# Altium PCB PCB2.PcbDoc
Units mm, origin at the board's own origin, x right, y up, seen from the top; angles counter-clockwise.
Board outline 69.51 x 75.85 mm, 2 copper layers (Top Layer, Bottom Layer); 17 components, 15 nets, 111 pads, 8 vias.
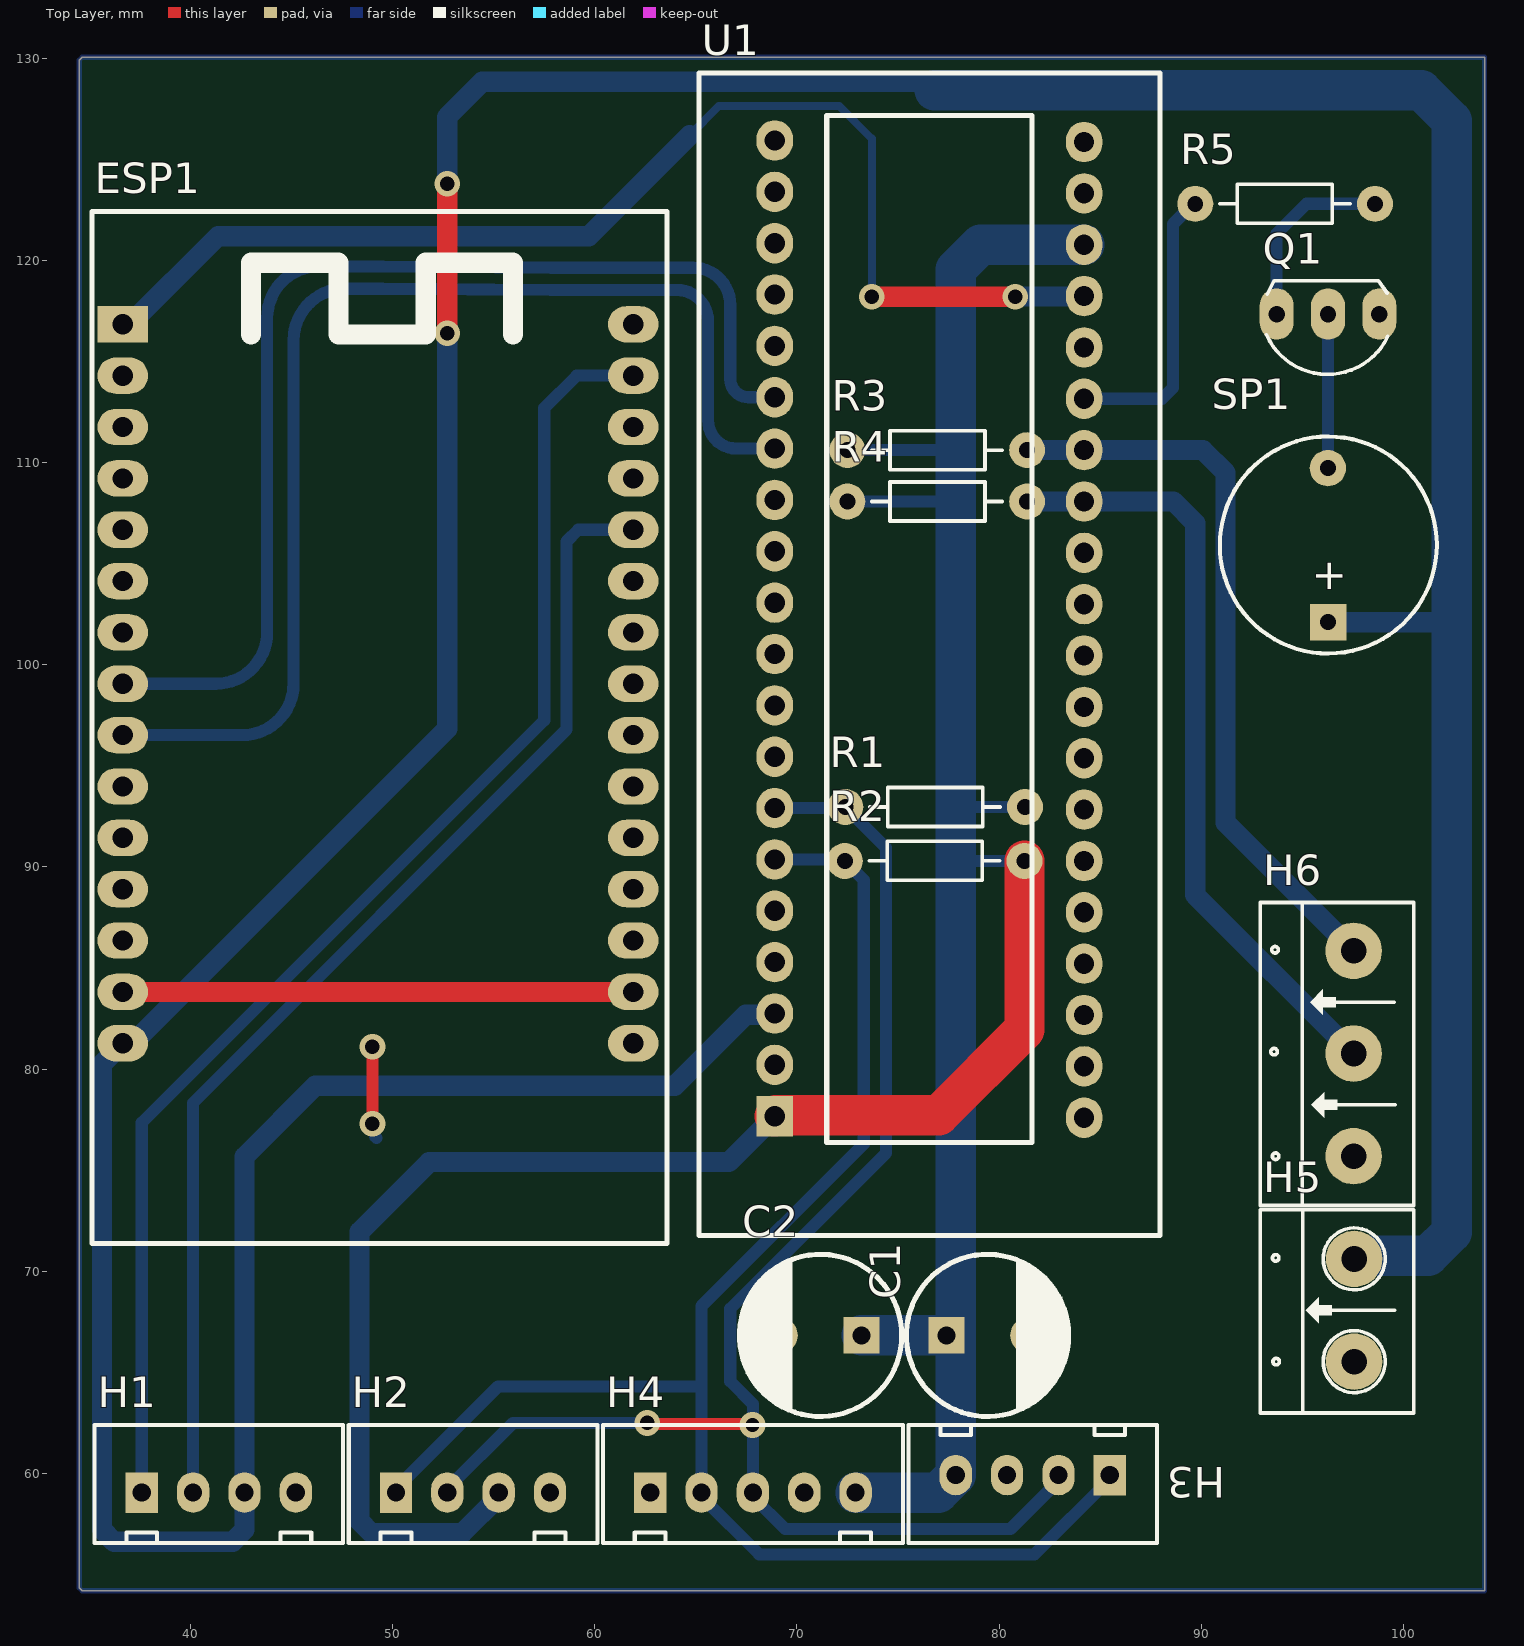
[diagram p0: Top Layer view]
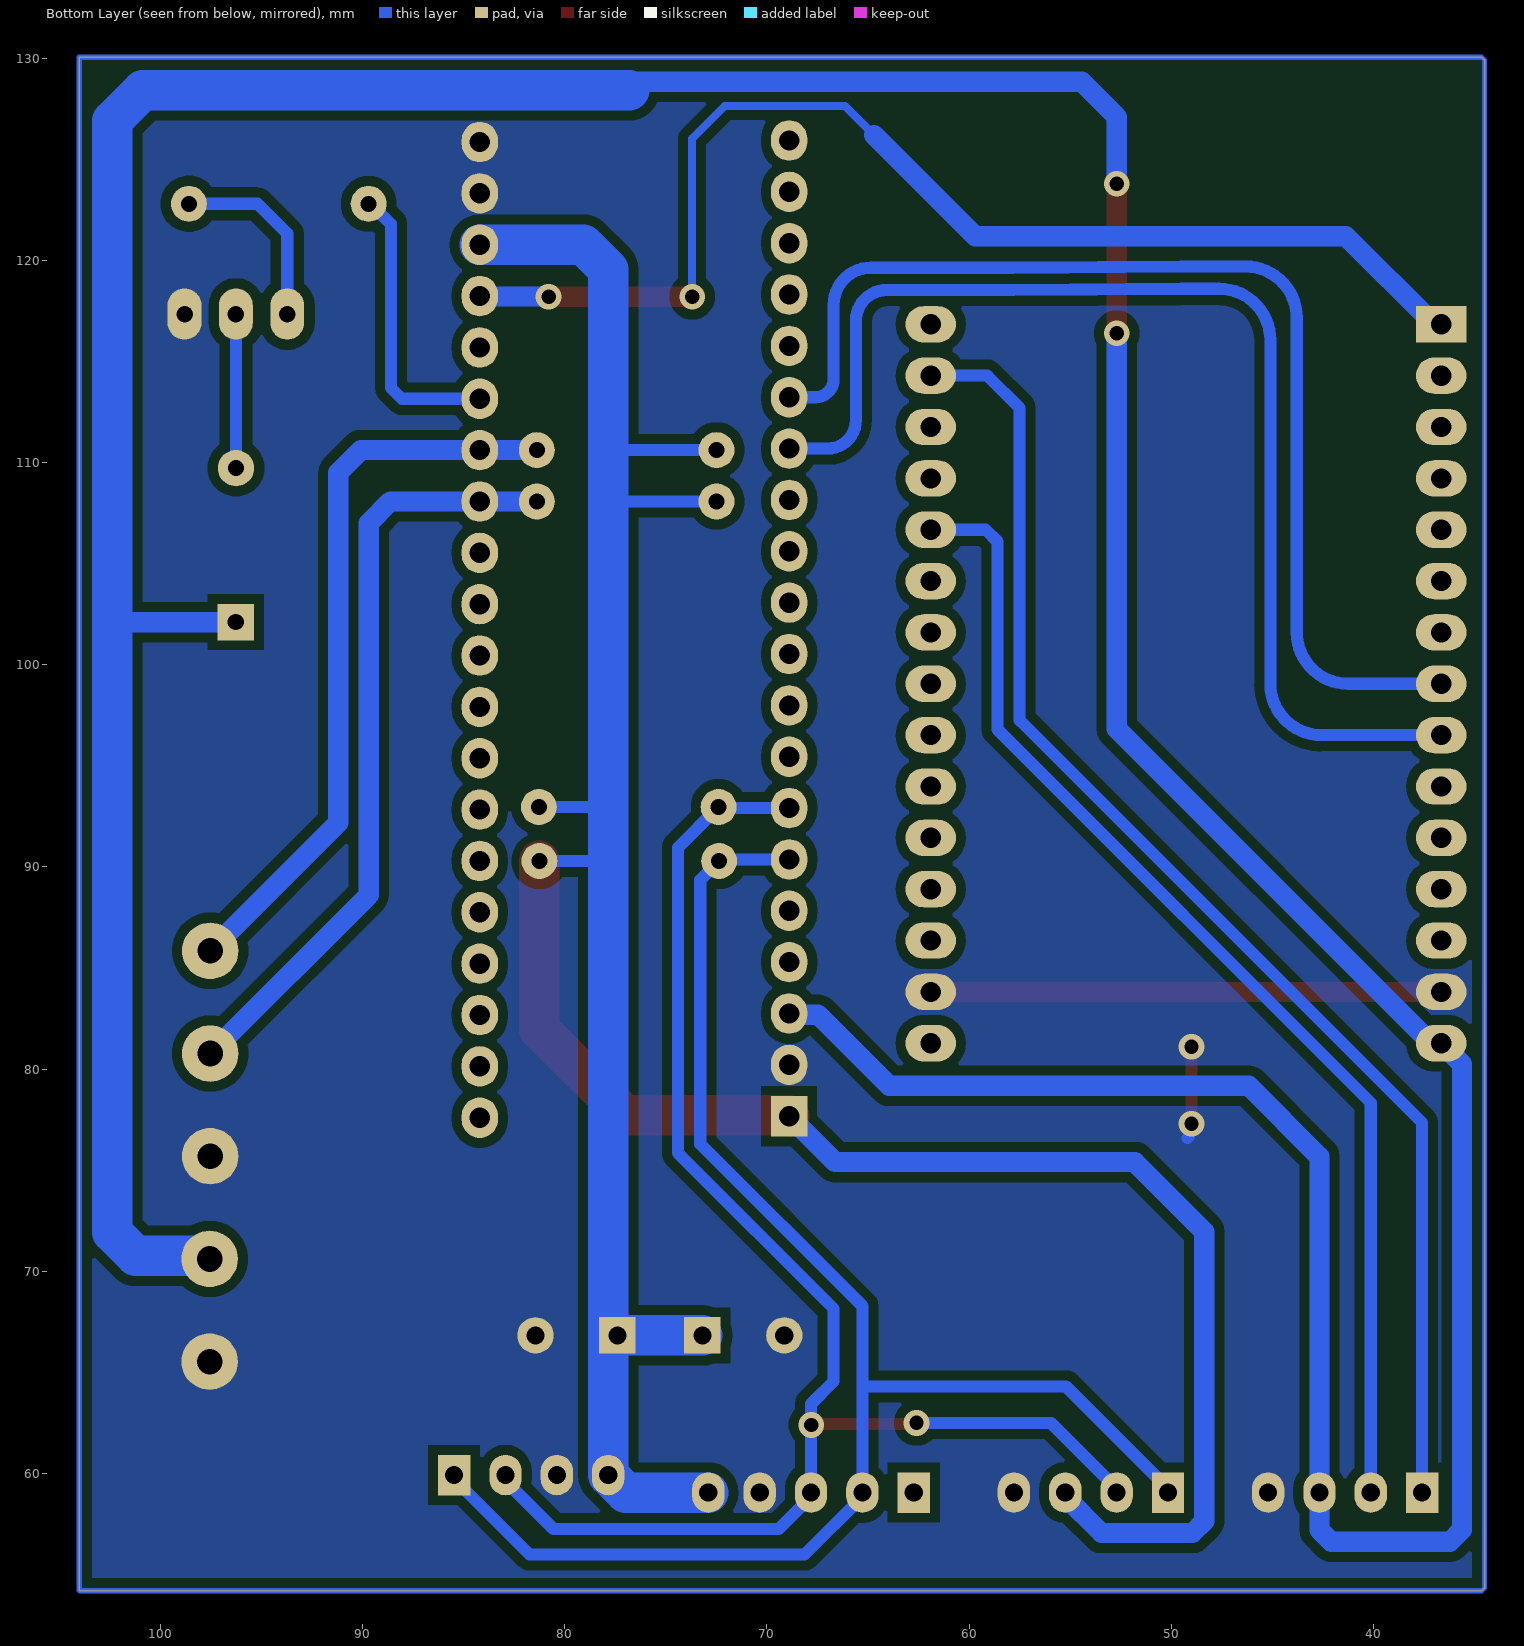
[diagram p1: Bottom Layer view, seen from below]
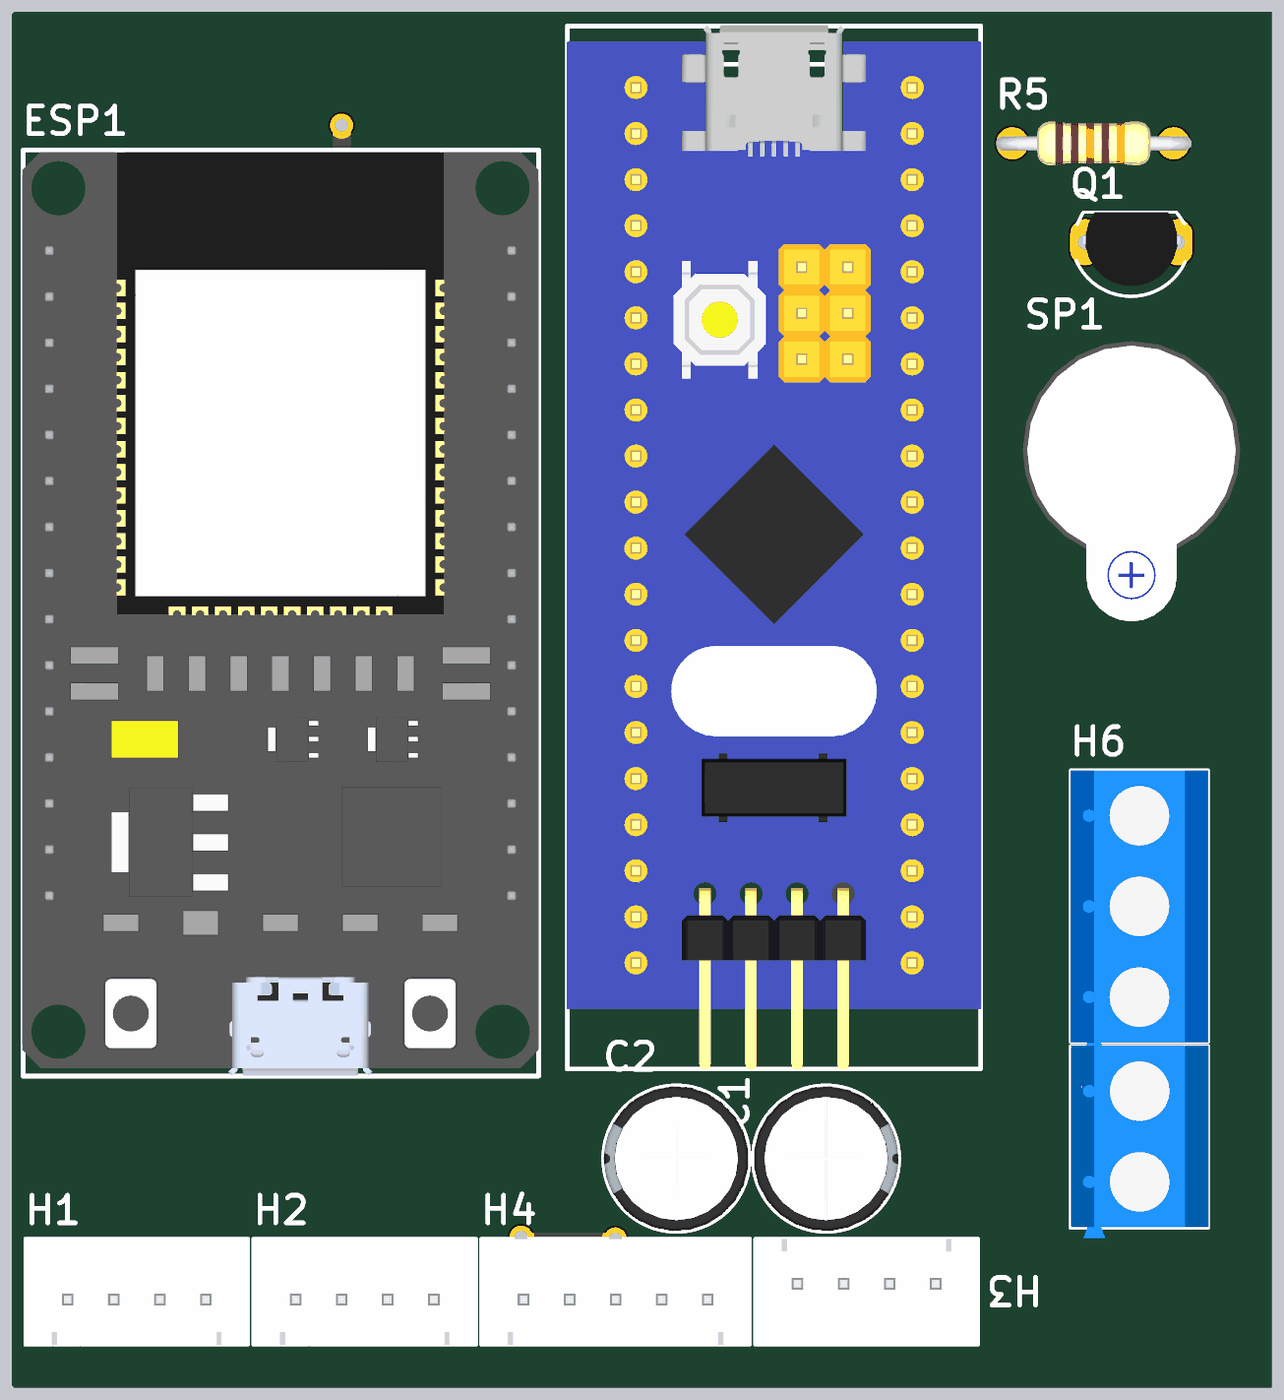
[diagram p2: 3D render of the assembled board from above, using the file's embedded part models]

## Layer stack, top to bottom
Top Solder: solder mask 0.0102, Solder Resist, Dk 3.5
Top Layer: signal copper 0.0356
Dielectric 1: dielectric 0.32, FR-4, Dk 4.8
Bottom Layer: signal copper 0.0356
Bottom Solder: solder mask 0.0102, Solder Resist, Dk 3.5

## Board outline
34.649,54.2 34.5,54.349 34.5,129.899 34.649,130.048 104.013,130.048 104.013,54.206 104,54.2

## Design rules (kind name [scope] priority, off if disabled: settings)
Clearance [All] p1: gap=0.5 ignorepadtopadclearanceinfootprint=FALSE
PolygonConnect [All] p1: connectstyle=Direct reliefconductorwidth=0.254 reliefentries=4 polygonreliefangle="90 Angle" airgapwidth=0.254
RoutingVias [All] p1: holewidth=0.711 width=1.27 viastyle="Through Hole" minholewidth=0.711 minwidth=1.27 maxholewidth=0.711 maxwidth=1.27
SolderMaskExpansion [All] p1: expansion=0.102 istentingtop=FALSE
Width [All] p1: maxlimit=2 minlimit=0.4 preferedwidth=0.6
30 further rules are at their usual default settings.

## Classes and differential pairs
component class Sheet2: C1 C2 ESP1 H1 H2 H3 H4 H5 Q1 R1 R2 R3 R4 SP1 U1

## Components (designator, comment, footprint, x,y, rotation, side; value= is the part's Value field where it differs from the comment)
C1 "100uF" "cap - 470uF/35v" 79.421,66.829 r0 top
C2 "100uF" "cap - 470uF/35v" 71.166,66.829 r180 top
ESP1 "ESP32 DEVKIT" ESP32 49.276,99.06 r0 top
H1 "LCD" "XH2.54 4P" 41.402,59.055 r0 top
H2 "OLED" "XH2.54 4P" 53.975,59.055 r0 top
H3 "GY906" "XH2.54 4P" 81.661,59.919 r180 top
H4 "MAX30100" "XH2.54 5P" 67.818,59.055 r0 top
H5 "PWR" "KF301 2P" 97.561,68.072 r90 top
H6 "KF301" "KF301 3P" 97.536,80.772 r90 top
Q1 "C1815" NPN 96.266,117.348 r180 top
R1 "10K" RES 76.987,89.408 r0 top
R2 "10K" RES 76.962,86.741 r0 top
R3 "10K" RES 77.089,107.061 r0 top
R4 "10K" RES 77.089,104.521 r0 top
R5 "1k" RES 93.993,126.356 r180 top
SP1 "5V" "Coi chip 5V" 96.266,105.918 r90 top
U1 "STM32F103C8T6" "KIT STM32F103C8T6" 76.551,101.765 r0 top

## Footprints (in the part's own frame and the unit in brackets; to place one, negate y for a bottom-side part, rotate by r counter-clockwise, add the part's x,y. Pads: shape width x height; smd on the part's side, far side on the other; paste and mask are expansions set on the pad)
"cap - 470uF/35v" [mm]
  rect 1.8x1.8 hole 0.9: 1(-2.025,0)
  round 1.8 hole 0.9: 2(2.025,0)
  silkscreen extent -4.01,-4.01 4.01,4.01, body extent -4,-4 4,4, height 3.48
"Coi chip 5V" [mm]
  rect 1.8x1.8 hole 0.8: 1(-3.81,-0.006)
  round 1.8 hole 0.8: 2(3.81,0.006)
  silkscreen extent -5.36,-5.38 5.37,5.35, body extent -9.48,-6.01 5.97,5.99, height 3.99
ESP32 [mm] "ESP32 DEVKIT"
  rect 2.5x1.8 hole 1: 1(-12.625,17.78)
  oval 2.5x1.8 hole 1: 2(-12.625,15.24) 3(-12.625,12.7) 4(-12.625,10.16) 5(-12.625,7.62) 6(-12.625,5.08) 7(-12.625,2.54) 8(-12.625,0) 9(-12.625,-2.54) 10(-12.625,-5.08) 11(-12.625,-7.62) 12(-12.625,-10.16) 13(-12.625,-12.7) 14(-12.625,-15.24) 15(-12.625,-17.78) 16(12.625,-17.78) 17(12.625,-15.24) 18(12.625,-12.7) 19(12.625,-10.16) 20(12.625,-7.62) 21(12.625,-5.08) 22(12.625,-2.54) 23(12.625,0) 24(12.625,2.54) 25(12.625,5.08) 26(12.625,7.62) 27(12.625,10.16) 28(12.625,12.7) 29(12.625,15.24) 30(12.625,17.78)
  silkscreen extent -14.15,-27.69 14.3,23.37, body extent -14.2,-27.67 14.3,23.26, height 6.9
"KF301 2P" [mil]
  round 110 hole 50: 1(-100,0) 2(100,0)
  silkscreen extent -200,-116 196,183, body extent -221,-117 196,183, height 396
"KF301 3P" [mil]
  round 110 hole 50: 1(-200,0) 2(0,0) 3(200,0)
  silkscreen extent -296,-117 294,182, body extent -320,-117 294,182, height 396
"KIT STM32F103C8T6" [mm]
  rect 1.8x2 hole 1: 1(-7.65,-24.092)
  oval 1.8x2 hole 1: 2(-7.65,-21.552) 3(-7.65,-19.012) 4(-7.65,-16.472) 5(-7.65,-13.932) 6(-7.65,-11.392) 7(-7.65,-8.852) 8(-7.65,-6.312) 9(-7.65,-3.772) 10(-7.65,-1.232) 11(-7.65,1.308) 12(-7.65,3.848) 13(-7.65,6.388) 14(-7.65,8.928) 15(-7.65,11.468) 16(-7.65,14.008) 17(-7.65,16.548) 18(-7.65,19.088) 19(-7.65,21.628) 20(-7.65,24.168) 21(7.65,24.092) 22(7.65,21.552) 23(7.65,19.012) 24(7.65,16.472) 25(7.65,13.932) 26(7.65,11.392) 27(7.65,8.852) 28(7.65,6.312) 29(7.65,3.772) 30(7.65,1.232) 31(7.65,-1.308) 32(7.65,-3.848) 33(7.65,-6.388) 34(7.65,-8.928) 35(7.65,-11.468) 36(7.65,-14.008) 37(7.65,-16.548) 38(7.65,-19.088) 39(7.65,-21.628) 40(7.65,-24.168)
  silkscreen extent -11.4,-30 11.4,27.5, body extent -11.42,-30.02 11.44,27.54, height 12.28
NPN [mil] "BCE"
  oval 66x100 hole 32: 1(-100,0) 2(0,0) 3(100,0)
  silkscreen extent -117,-65 120,118, body extent -109,-66 109,95, height 245
RES [mil] "NGANG"
  round 70 hole 31: 1(-181,140) 2(169,140)
  silkscreen extent -133,102 121,178, body extent -221,93 205,187, height 111
"XH2.54 4P" [mm]
  rect 1.6x2 hole 0.9: 1(-3.81,0)
  oval 1.6x2 hole 0.9: 2(-1.27,0) 3(1.27,0) 4(3.81,0)
  silkscreen extent -6.15,-2.49 6.15,3.35, body extent -6.15,-2.49 6.15,3.35, height 7.21
"XH2.54 5P" [mm]
  rect 1.6x2 hole 0.9: 1(-5.08,0)
  oval 1.6x2 hole 0.9: 2(-2.54,0) 3(0,0) 4(2.54,0) 5(5.08,0)
  silkscreen extent -7.42,-2.49 7.42,3.35, body extent -7.42,-2.49 7.42,3.35, height 7.21

## Part data
C1 C2: library part Cap1, "phan cuc"
ESP1: library part ESP32, "module"
H1 H2 H3: library part "HEADER 4P", "Header"
H4: library part "HEADER 5P", "Header"
H5: library part "HEADER 2P", "Header"
H6: library part "HEADER 3P", "Header"
Q1: "NPN"
R1 R2 R3 R4 R5: library part Resistor, "1k, 1/4W"
SP1: library part "Coi chip 5V", "Speaker"
U1: library part STM32

## Via types
v1: diameter 1.27, hole 0.711, Top Layer to Bottom Layer, 8 vias

## Nets (pads, with @x,y where several pads share a name; then routed paths per layer and width w, separated by ;. In a path a pad name is that pad's centre, name@x,y a point inside that pad or via, vN(x,y) a via of type N, cw(c..) or ccw(c..) an arc to the next point about the centre after c; other vN are vias at no path point)
+3.3: C1.1 C2.1 H2.3 H3.4 H4.5 R1.2 R2.2 R3.1 R4.1 U1.1 U1.23 | length 162.1
  Top Layer w2: U1.1 68.941,77.712 77.012,77.712 81.255,81.955 R2.2
  Bottom Layer w0.6: R4.1 77.828,108.077 77.851,108.1 ; R3.1 77.834,110.617 77.851,110.6 ; 77.851,90.3 81.252,90.3 R2.2 ; 77.851,92.8 78.015,92.964 R1.2
  Bottom Layer w1: H2.3 55.245,58.849 53.451,57.055 48.951,57.055 48.365,57.641 48.365,71.965 51.8,75.4 66.629,75.4 U1.1
  Bottom Layer w2: H4.5 76.987,59.055 H3.4 C1.1@77.851,66.374 ; C2.1 C1.1 C1.1@77.851,66.374 ; U1.23 79.077,120.777 77.851,119.551 77.851,110.6 77.851,108.1 77.851,92.8 77.851,90.3 C1.1@77.851,66.374
+5: ESP1.15 H1.3 H5.2 SP1.1 U1.3 | length 249.4
  Top Layer w1: v1(52.7,116.4) v1(52.7,123.8)
  Bottom Layer w1: ESP1.15@36.148,80.777 35.627,80.256 35.627,57.212 36.213,56.626 42.086,56.626 42.672,57.212 H1.3 42.672,75.672 46.172,79.172 63.951,79.172 67.469,82.69 68.839,82.69 U1.3 ; ESP1.15 37.148,81.28 52.7,96.832 v1(52.7,116.4) ; v1(52.7,123.8) 52.7,127.1 54.432,128.832 76.389,128.832 76.8,128.421 ; SP1.1 102.294,102.108 102.386,102.2
  Bottom Layer w2: 76.8,128.421 100.879,128.421 102.386,126.914 102.386,102.2 102.386,71.935 101.214,70.764 97.713,70.764 H5.2
BTN1: H6.3 R3.2 U1.27 | length 36.6
  Bottom Layer w1: R3.2 U1.27 90.083,110.617 91.2,109.5 91.2,92.188 H6.3
BTN2: H6.2 R4.2 U1.28 | length 38.2
  Bottom Layer w1: R4.2 U1.28 88.623,108.077 89.7,107 89.7,88.608 H6.2
EN: ESP1.1 U1.24 | length 60.5
  Top Layer w1: v1(73.7,118.2) v1(80.8,118.2)
  Bottom Layer w0.4: 64.7,126.2 66.132,127.632 72.089,127.632 73.7,126.021 v1(73.7,118.2)
  Bottom Layer w1: ESP1.1 37.001,116.84 41.361,121.2 59.7,121.2 64.7,126.2 ; v1(80.8,118.2) 80.818,118.218 84.182,118.218 U1.24
GND: C1.2 C2.2 ESP1.14 ESP1.17 H1.4 H2.4 H3.3 H4.4 H5.1 H6.1 Q1.1 U1.2 U1.21 U1.22 | length 29.8
  Top Layer w0.6: v1(49,77.3) v1(49,81.1)
  Top Layer w1: ESP1.14 ESP1.17
  Bottom Layer w0.6: v1(49,77.3) 49.128,77.172 49.128,76.672 49.2,76.6
NetQ1_2: Q1.2 SP1.2 | length 7.6
  Bottom Layer w0.6: SP1.2 96.263,109.731 96.263,117.345 Q1.2
NetQ1_3: Q1.3 R5.1 | length 9.5
  Bottom Layer w0.6: Q1.3 93.726,121.326 95.2,122.8 R5.1
RX_ESP: ESP1.8 U1.15 | length 55.9
  Bottom Layer w0.6: ESP1.8 41.252,99.06 ccw(c41.252,101.6) 43.792,101.6 43.792,117.16 cw(c46.332,117.16) 46.332,119.7 49.5,119.7 cw(c49.5,118.6) 49.508,119.7 57.825,119.64 ccw(c57.83,120.24) 57.83,119.64 64.86,119.64 cw(c64.86,117.8) 66.7,117.8 66.7,114.132 ccw(c67.6,114.132) 67.6,113.232 U1.15
SCL: ESP1.29 H1.1 | length 67
  Bottom Layer w0.6: H1.1 37.592,77.348 57.5,97.256 57.5,112.7 59.1,114.3 ESP1.29
SCL_STM: H2.2 H3.2 H4.3 R1.1 U1.7 | length 75.9
  Top Layer w0.6: v1(62.6,62.5) 62.65,62.45 67.75,62.45 v1(67.8,62.4)
  Bottom Layer w0.6: H2.2 52.705,59.255 55.95,62.5 v1(62.6,62.5) ; U1.7 R1.1@72.442,92.912 ; R1.1 R1.1@72.442,92.912 ; H3.2 82.931,59.631 80.555,57.255 69.418,57.255 67.818,58.855 H4.3 67.818,62.4 67.818,63.437 66.7,64.555 66.7,68.144 74.4,75.844 74.4,90.954 R1.1@72.442,92.912
SDA: ESP1.26 H1.2 | length 58.2
  Bottom Layer w0.6: H1.2 40.132,78.332 58.6,96.8 58.6,106.1 59.18,106.68 ESP1.26
SDA_STM: H2.1 H3.1 H4.2 R2.1 U1.6 | length 79.2
  Bottom Layer w0.6: H2.1 50.165,59.255 55.21,64.3 65.278,64.3 ; U1.6 72.365,90.372 72.365,90.292 73.3,89.357 73.3,76.3 65.278,68.278 65.278,64.3 ; H3.1 85.471,59.719 81.752,56 68.133,56 65.278,58.855 H4.2 65.278,64.3
SPK: R5.2 U1.26 | length 13.8
  Bottom Layer w0.6: U1.26 88.057,113.157 88.6,113.7 88.6,121.8 R5.2@89.343,122.543
TX_ESP: ESP1.9 U1.14 | length 58.7
  Bottom Layer w0.6: ESP1.9 42.56,96.52 ccw(c42.56,99.06) 45.1,99.06 45.1,116.06 cw(c47.64,116.06) 47.64,118.6 49.499,118.6 cw(c49.497,118) 49.502,118.6 57.817,118.54 ccw(c57.83,120.24) 57.83,118.54 64.06,118.54 cw(c64.06,117) 65.6,117 65.6,112.092 ccw(c67,112.092) 67,110.692 U1.14
pads on no net: ESP1.2 ESP1.3 ESP1.4 ESP1.5 ESP1.6 ESP1.7 ESP1.10 ESP1.11 ESP1.12 ESP1.13 ESP1.16 ESP1.18 ESP1.19 ESP1.20 ESP1.21 ESP1.22 ESP1.23 ESP1.24 ESP1.25 ESP1.27 ESP1.28 ESP1.30 H4.1 U1.4 U1.5 U1.8 U1.9 U1.10 U1.11 U1.12 U1.13 U1.16 U1.17 U1.18 U1.19 U1.20 U1.25 U1.29 U1.30 U1.31 U1.32 U1.33 U1.34 U1.35 U1.36 U1.37 U1.38 U1.39 U1.40
copper on no net: | length 290.5
  Bottom Layer w0.254: 104,54.2 34.649,54.2 34.5,54.349 34.5,129.899 34.649,130.048 104.013,130.048 104.013,54.206 104.006,54.206

## Polygon pours and split planes (outlines as drawn)
GND on Bottom Layer "GND_L02_P000" (solid, remove dead copper, pour order 0): 34.649,54.2 34.649,130.048 104.013,130.048 104.013,54.213 104,54.2

## Text inside footprints (layer, text, board x,y; h text height)
SP1: Top Overlay "+" at 96.984,103.518 h1.52 r90